# Altium PCB UI PCB.PcbDoc
Units mil, origin at the board's own origin, x right, y up, seen from the top; angles counter-clockwise.
Board outline 6000 x 4000 mil, 2 copper layers (Top Layer, Bottom Layer); 36 components, 51 nets, 159 pads, 0 vias.
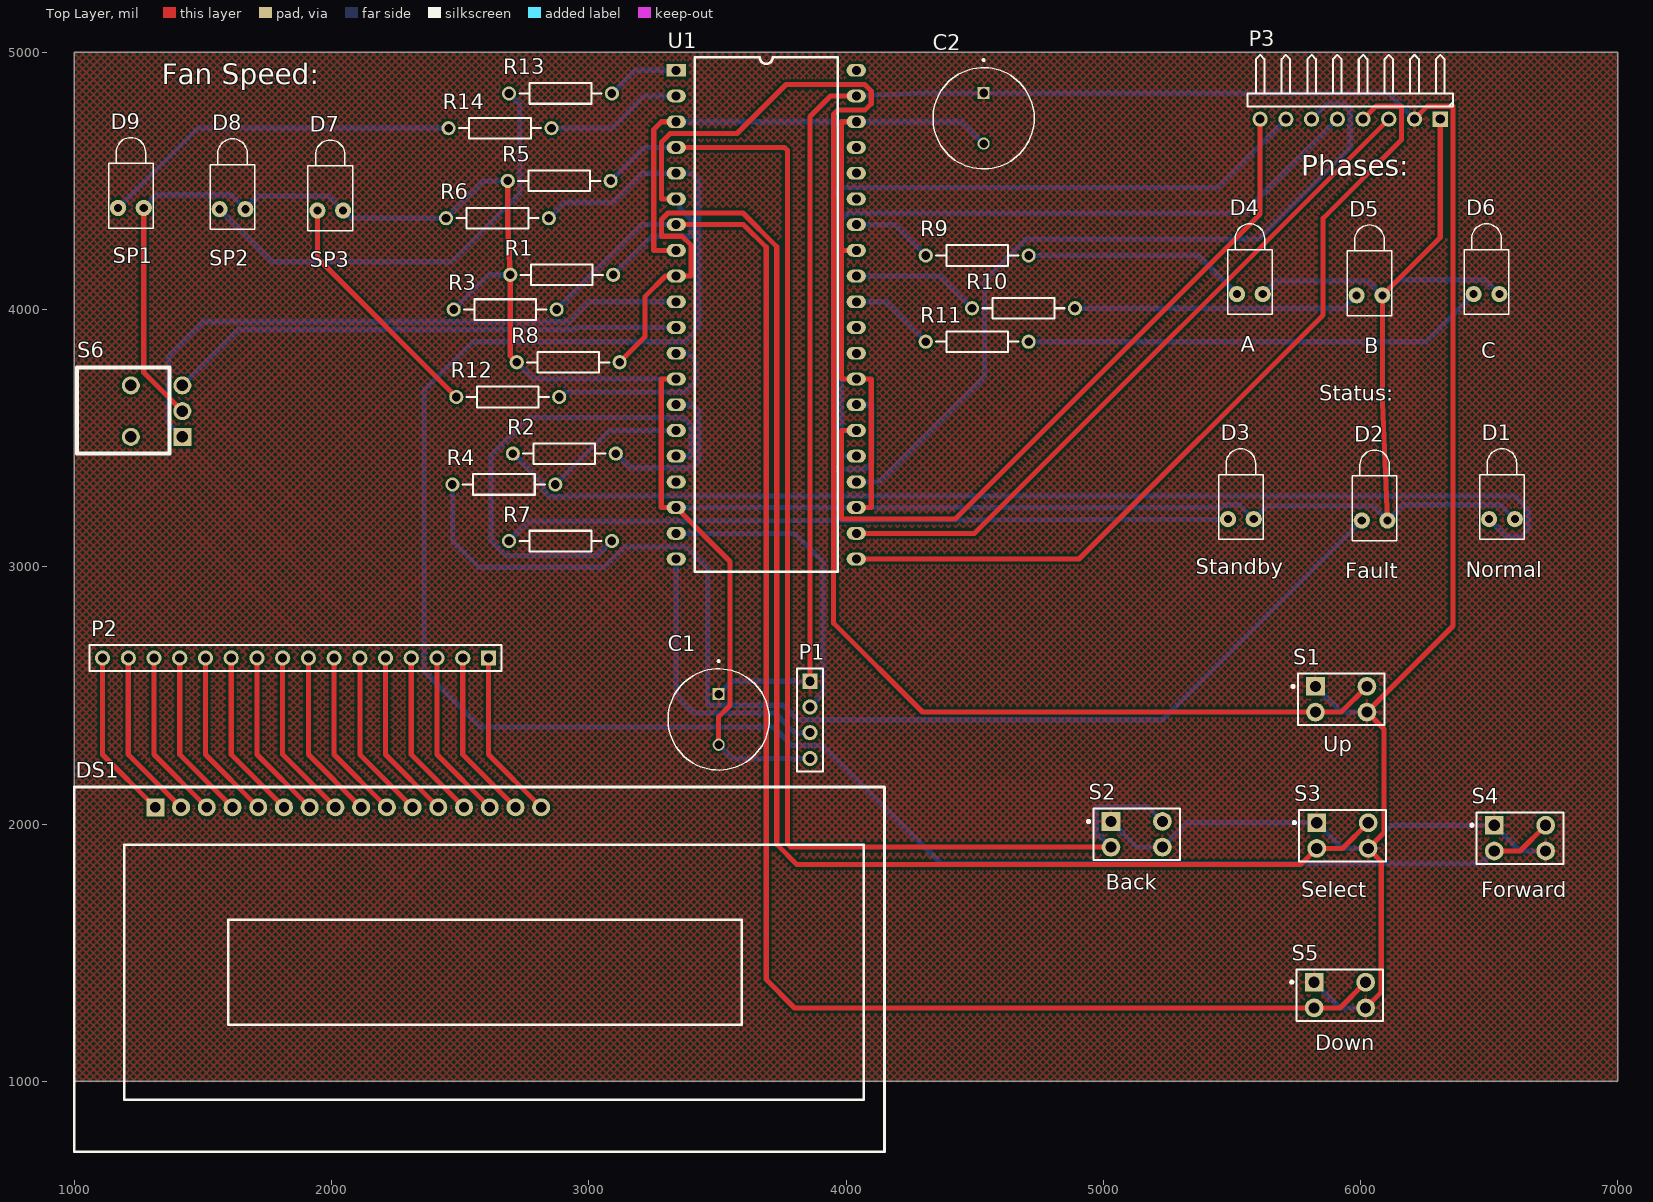
[diagram p0: Top Layer view]
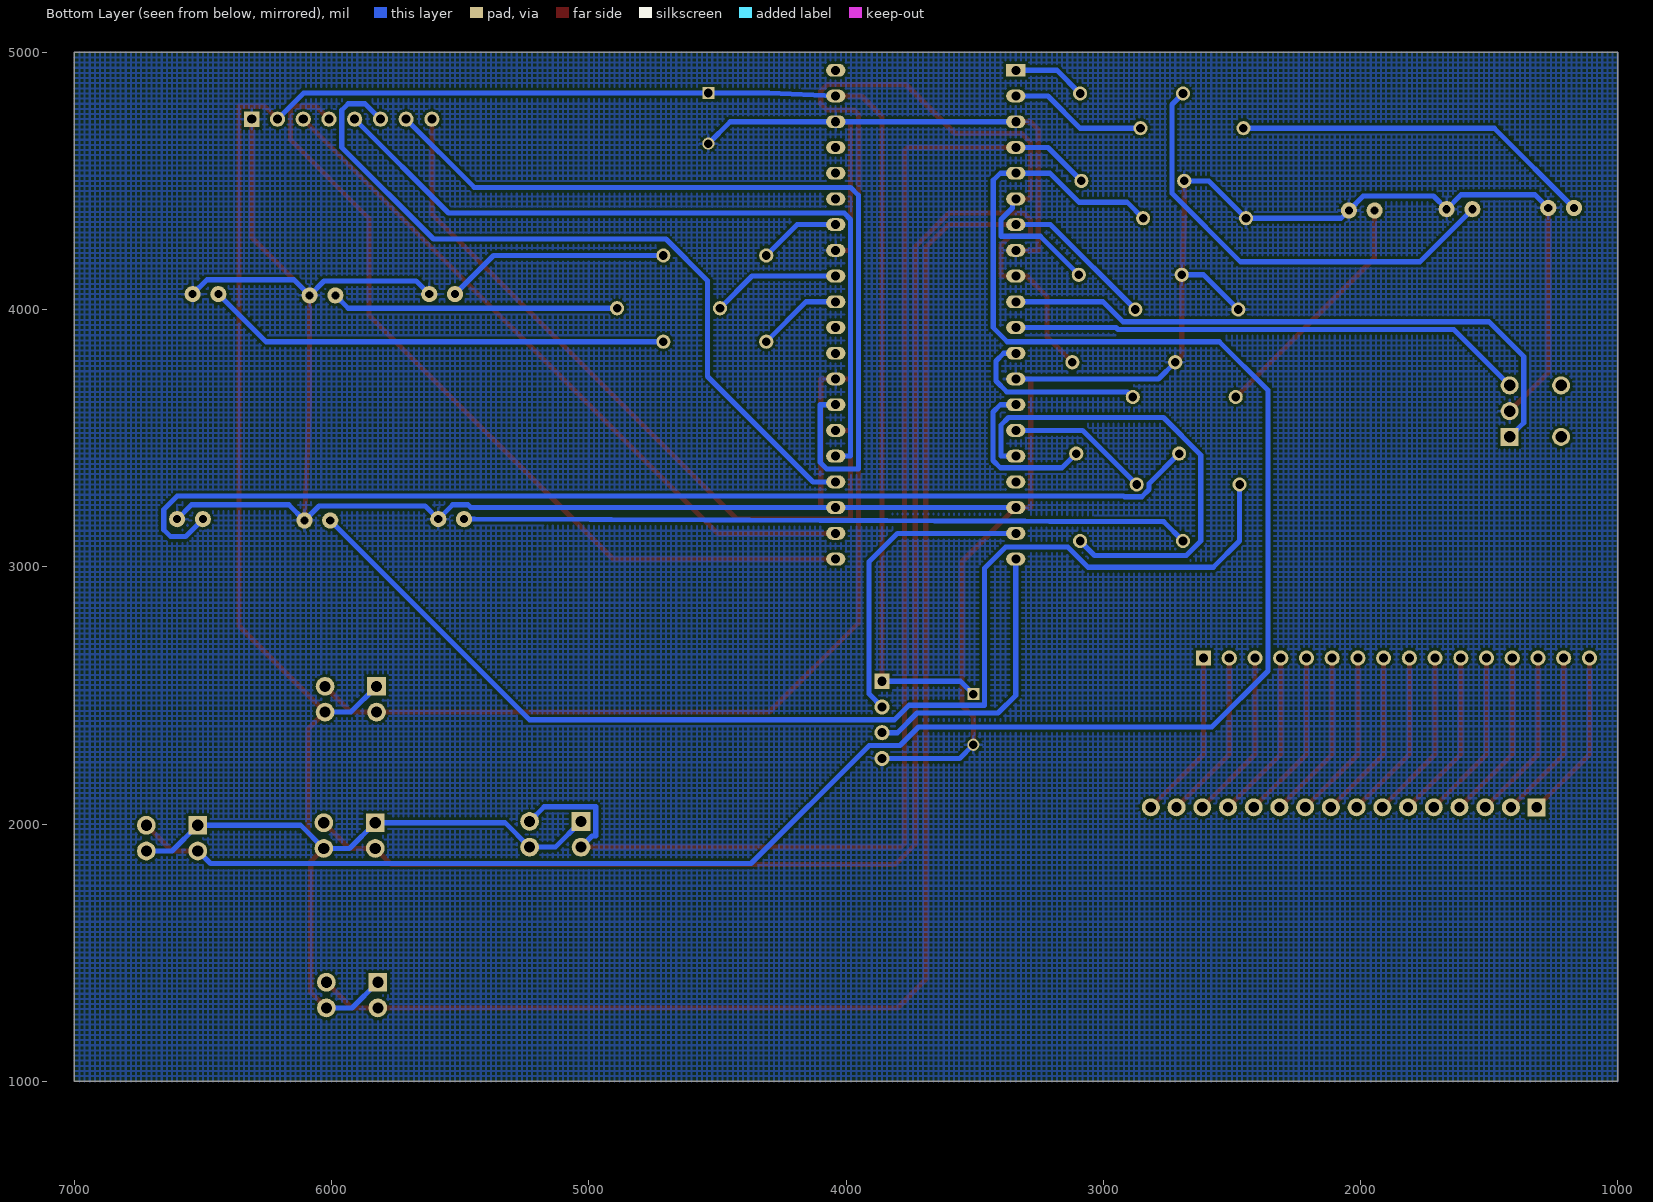
[diagram p1: Bottom Layer view, seen from below]

## Layer stack, top to bottom
Top Solder: solder mask 0.4, Solder Resist, Dk 3.5
Top Layer: signal copper 1.4
Dielectric 1: dielectric 12.6, FR-4, Dk 4.8
Bottom Layer: signal copper 1.4
Bottom Solder: solder mask 0.4, Solder Resist, Dk 3.5

## Board outline
1000,1000 7000,1000 7000,5000 1000,5000

## Design rules (kind name [scope] priority, off if disabled: settings)
Clearance [All] p1: gap=10 ignorepadtopadclearanceinfootprint=FALSE
PolygonConnect [All] p1: connectstyle=Relief reliefconductorwidth=10 reliefentries=4 polygonreliefangle="90 Angle" airgapwidth=10
RoutingVias [All] p1: holewidth=28 width=50 viastyle="Through Hole" minholewidth=28 minwidth=50 maxholewidth=28 maxwidth=50
SolderMaskExpansion [All] p1: expansion=4 istentingtop=FALSE
SupplyNets "Schematic Supply Nets_1" [InNet('VCC')] p1: voltage=0.000
SupplyNets "Schematic Supply Nets" [InNet('GND')] p2: voltage=0.000
Width [All] p1: maxlimit=20 minlimit=20 preferedwidth=20
30 further rules are at their usual default settings.

## Components (designator, comment, footprint, x,y, rotation, side; value= is the part's Value field where it differs from the comment)
C1 "100 uF PCap" "100uF PCap" 3505,2406.57 r270 top
C2 "100 uF PCap" "100uF PCap" 4535,4743.43 r270 top
D1 "LED-G" LED-1 6550,3185 r90 top
D2 "LED-R" LED-1 6055,3180 r90 top
D3 "LED-B" LED-1 5535,3185 r90 top
D4 "LED-G" LED-1 5570,4060 r90 top
D5 "LED-R" LED-1 6035,4055 r90 top
D6 "LED-B" LED-1 6490,4060 r90 top
D7 "LED-G" LED-1 1995,4385 r90 top
D8 "LED-R" LED-1 1615,4390 r90 top
D9 "LED-B" LED-1 1220,4395 r90 top
DS1 "LCD 44780" "OLED 16x2" 1315,2065 r0 top
P1 "Header 4" HDR1X4 3860,2555 r270 top
P2 "Header 16" HDR1X16 2610,2645 r180 top
P3 "Header 8H" HDR1X8H 6310,4740 r180 top
R1 "Res2" AXIAL-0.4 2895,4135 r180 top value=1K
R2 "Res2" AXIAL-0.4 2905,3440 r180 top value=1K
R3 "Res2" AXIAL-0.4 2675,4000 r180 top value=1K
R4 "Res2" AXIAL-0.4 2670,3320 r180 top value=1K
R5 "Res2" AXIAL-0.4 2885,4500 r180 top value=1K
R6 "Res2" AXIAL-0.4 2645,4355 r180 top value=1K
R7 "Res2" AXIAL-0.4 2890,3100 r180 top value=1K
R8 "Res2" AXIAL-0.4 2920,3795 r180 top value=1K
R9 "Res2" AXIAL-0.4 4510,4210 r0 top value=1K
R10 "Res2" AXIAL-0.4 4690,4005 r0 top value=1K
R11 "Res2" AXIAL-0.4 4510,3875 r0 top value=1K
R12 "Res2" AXIAL-0.4 2685,3660 r180 top value=1K
R13 "Res2" AXIAL-0.4 2890,4840 r180 top value=1K
R14 "Res2" AXIAL-0.4 2655,4705 r180 top value=1K
S1 "Up" DPST-4 5925,2485 r0 top
S2 "Back" DPST-4 5130,1960 r0 top
S3 "Select" DPST-4 5930,1955 r0 top
S4 "Forward" DPST-4 6620,1945 r0 top
S5 "Down" DPST-4 5920,1335 r0 top
S6 "SW-SPDT" "SW DPST jameco" 1421.89,3602.64 r270 top
U1 "Raspberry Pi Pico" "Raspberry Pi Pico" 3340,4930 r0 top

## Footprints (in the part's own frame and the unit in brackets; to place one, negate y for a bottom-side part, rotate by r counter-clockwise, add the part's x,y. Pads: shape width x height; smd on the part's side, far side on the other; paste and mask are expansions set on the pad)
"100uF PCap" [mm]
  round 1.2 hole 0.85: N(2.5,0)
  rect 1.2x1.2 hole 0.85: P(-2.5,0)
  silkscreen extent -5.85,-5 5,5, body extent -5,-5 5,5, height 12.5
AXIAL-0.4 [mm] "Axial Device, Thru-Hole; 2 Leads; 0.4 in Pin Spacing"
  round 1.4 hole 0.85: 1(-5.08,0) 2(5.08,0)
  silkscreen extent -4.06,-1.02 4.06,1.02
DPST-4 [mm] "Switch; 4 Leads"
  rect 1.85x1.85 hole 1.1: 1(-2.54,1.27)
  round 1.85 hole 1.1: 2(-2.54,-1.27) 3(2.54,-1.27) 4(2.54,1.27)
  silkscreen extent -4.88,-2.54 4.28,2.54
HDR1X4 [mm] "Connector; Header; 4 Position"
  rect 1.5x1.5 hole 0.9: 1(0,0)
  round 1.5 hole 0.9: 2(2.54,0) 3(5.08,0) 4(7.62,0)
  silkscreen extent -1.27,-1.27 8.89,1.27
HDR1X8H [mm] "Connector; Header; 8 Position; Right Angle"
  rect 1.5x1.5 hole 0.9: 1(0,0)
  round 1.5 hole 0.9: 2(2.54,0) 3(5.08,0) 4(7.62,0) 5(10.16,0) 6(12.7,0) 7(15.24,0) 8(17.78,0)
  silkscreen extent -1.27,-6.35 19.05,-1.27
HDR1X16 [mm] "Connector; Header; 16 Position"
  rect 1.5x1.5 hole 0.9: 1(0,0)
  round 1.5 hole 0.9: 2(2.54,0) 3(5.08,0) 4(7.62,0) 5(10.16,0) 6(12.7,0) 7(15.24,0) 8(17.78,0) 9(20.32,0) 10(22.86,0) 11(25.4,0) 12(27.94,0) 13(30.48,0) 14(33.02,0) 15(35.56,0) 16(38.1,0)
  silkscreen extent -1.27,-1.27 39.37,1.27
LED-1 [mm] "LED; 2 Leads"
  round 1.6 hole 0.8: 1(0,1.27) 2(0,-1.27)
  silkscreen extent -2,-2.2 6.95,2.2
"OLED 16x2" [mil]
  rect 70x70 hole 40: 1(0,0)
  round 70 hole 40: 2(100,0) 3(200,0) 4(300,0) 5(400,0) 6(500,0) 7(600,0) 8(700,0) 9(800,0) 10(900,0) 11(1000,0) 12(1100,0) 13(1200,0) 14(1300,0) 15(1400,0) 16(1500,0)
  silkscreen extent -315,-1339 2835,79
"Raspberry Pi Pico" [mil]
  rect 75x50 hole 35: 1(0,0)
  oval 75x50 hole 35: 2(0,-100) 3(0,-200) 4(0,-300) 5(0,-400) 6(0,-500) 7(0,-600) 8(0,-700) 9(0,-800) 10(0,-900) 11(0,-1000) 12(0,-1100) 13(0,-1200) 14(0,-1300) 15(0,-1400) 16(0,-1500) 17(0,-1600) 18(0,-1700) 19(0,-1800) 20(0,-1900) 21(700,-1900) 22(700,-1800) 23(700,-1700) 24(700,-1600) 25(700,-1500) 26(700,-1400) 27(700,-1300) 28(700,-1200) 29(700,-1100) 30(700,-1000) 31(700,-900) 32(700,-800) 33(700,-700) 34(700,-600) 35(700,-500) 36(700,-400) 37(700,-300) 38(700,-200) 39(700,-100) 40(700,0)
  silkscreen extent 72,-1950 628,50
"SW DPST jameco" [mil]
  rect 70x70 hole 45: 1(97.64,-1.89)
  round 70 hole 45: 2(-2.36,-1.89) 3(-102.36,-1.89) 4(-102.36,-201.89) 5(97.64,-201.89)
  silkscreen extent -172,-412 162,-52

## Part data
C1 C2: "Capacitor; Aluminum Electrolytic; Radial Al Electrolytic Cap; 100uF 63V", Package="RADIAL-2 Panasonic", Availability="In Stock", Check_prices=https://www.snapeda.com/parts/EEU-FC1J101/Panasonic%20Electronic%20Components/view-part/494707/?ref=eda, MF="Panasonic Electronic", MP=EEU-FC1J101, Price=None, SnapEDA_Link=https://www.snapeda.com/parts/EEU-FC1J101/Panasonic%20Electronic%20Components/view-part/494707/?ref=snap
D1 D2 D3 D4 D5 D6 D7 D8 D9: library part LED1, "Typical RED GaAs LED", LatestRevisionDate=08-Jul-2005, LatestRevisionNote="Mech Layer 1 removed.", PackageDescription="LED; 2 Leads", PackageReference=LED-1, Published=8-Jun-2000, Publisher="Altium Limited"
P1: "Header, 4-Pin", LatestRevisionDate=17-Jul-2002, LatestRevisionNote="Re-released for DXP Platform.", Publisher="Altium Limited"
P2: "Header, 16-Pin", LatestRevisionDate=17-Jul-2002, LatestRevisionNote="Re-released for DXP Platform.", Publisher="Altium Limited"
P3: "Header, 8-Pin, Right Angle", LatestRevisionDate=17-Jul-2002, LatestRevisionNote="Re-released for DXP Platform.", Publisher="Altium Limited"
R1 R2 R3 R4 R5 R6 R7 R8 R9 R10 R11 R12 R13 R14: "Resistor", LatestRevisionDate=17-Jul-2002, LatestRevisionNote="Re-released for DXP Platform.", PackageDescription="Axial Device, Thru-Hole; 2 Leads; 0.4 in Pin Spacing", PackageReference=AXIAL-0.4, Published=8-Jun-2000, Publisher="Altium Limited"
S1 S2 S3 S4 S5: library part SW-DPST, "Double-Pole, Single-Throw Switch", LatestRevisionDate=17-Jul-2002, LatestRevisionNote="Re-released for DXP Platform.", PackageDescription="Switch; 4 Leads", PackageReference=DPST-4, Published=24-Mar-1999, Publisher="Altium Limited"
S6: "SPDT Subminiature Toggle Switch, Right Angle Mounting, Vertical Actuation", ComponentLink1Description="Manufacturer Link", ComponentLink1URL=http://www.apem.com, DatasheetVersion=05-Dec-2000, LatestRevisionDate=17-Dec-2003, LatestRevisionNote="Schematic revised, PCB Footprint replaced.", PackageDescription="Switch; 4 Leads", PackageReference=TL36WW15050, Published=24-Mar-1999, Publisher="Altium Limited"

## Nets (pads, with @x,y where several pads share a name; then routed paths per layer and width w, separated by ;. In a path a pad name is that pad's centre, name@x,y a point inside that pad or via, vN(x,y) a via of type N, cw(c..) or ccw(c..) an arc to the next point about the centre after c; other vN are vias at no path point)
B_LED: R7.1 U1.16 | length 1877.9
  Bottom Layer w20: R7.1 3034,3044 2677,3044 2621,3100 2621,3435 2766,3580 3368,3580 3398,3550 3398,3430 U1.16
Back_In: R5.1 S2.2 S2.4 U1.4 | length 5174.2
  Top Layer w20: U1.4 3761,4630 3772,4619 3772,1923 3785,1910 S2.2
  Bottom Layer w20: R5.1 3215,4630 U1.4 ; S2.2 4987,1953 4973,1953 4973,2067 5173,2067 S2.4
CS: P3.3 U1.22 | length 2736.9
  Top Layer w20: U1.22 4500,3130 P3.3
Down_In: R3.1 S5.2 S5.4 U1.7 | length 6252.1
  Top Layer w20: U1.7 3602,4330 3690,4242 3690,1395 3800,1285 S5.2 5920,1285 S5.4
  Bottom Layer w20: R3.1 3205,4330 U1.7
Fanspeed1: R12.1 U1.12 | length 725.1
  Bottom Layer w20: R12.1 2905,3680 3375,3680 3417,3722 3417,3800 3387,3830 U1.12
Fanspeed2: R13.1 U1.1 | length 287.3
  Bottom Layer w20: R13.1 3180,4930 U1.1
Fanspeed3: R14.1 U1.2 | length 536.8
  Bottom Layer w20: R14.1 3090,4705 3215,4830 U1.2
Forward_In: R6.1 S4.2 S4.4 U1.5 | length 8230.7
  Top Layer w20: S4.2 6620,1895 S4.4
  Bottom Layer w20: R6.1 2907,4417 3094,4417 3207,4530 U1.5 3400,4530 3427.5,4502.5 3427.5,3929.5 3373,3875 2549,3875 2360,3686 2360,2595 2578,2377 3718.01,2377 3790.01,2305 3910,2305 4369,1846 6471,1846 S4.2
G_LED: R2.1 U1.14 | length 646
  Bottom Layer w20: R2.1 3160,3385 3400,3385 3428,3413 3428,3602 3400,3630 U1.14
GND: C1.N C2.N D1.2 D2.2 D3.2 D4.2 D5.2 D6.2 D7.2 D8.2 D9.2 P1.4 P3.1 R1.2 R3.2 R5.2 R6.2 R8.2 S6.2 U1.3 U1.8 U1.13 U1.18 U1.23 U1.28 U1.33 U1.38 | length 15811
  Top Layer w20: D9.2 1270,3755 S6.2 ; R5.2 2685,4328 R1.2 2695,3820 R8.2 ; U1.13 3282,3730 3282,3230 U1.18 3549,3021 3549,2461 3505,2417 C1.N ; U1.8 3252.5,4230 3252.5,4700 3282.5,4730 U1.3 ; U1.23 4098,3230 4098,3730 U1.28 3982,3730 3982,4230 ; U1.33 3982,4230 ; U1.38 3982,4730 3982,4230 ; D2.2 6085,3638 D5.2 6310,4280 P3.1
  Bottom Layer w20: D9.2 1321,4446 1609,4446 D8.2 1716,4441 1989,4441 D7.2 2075,4355 R6.2 2590,4500 R5.2 ; R3.2 2610,4135 R1.2 ; R8.2 2785,3730 U1.13 ; U1.18 U1.23 5459,3230 5470,3241 5529,3241 D3.2 5636,3236 6049,3236 D2.2 6166,3241 6544,3241 D1.2 ; U1.3 U1.38 4450,4730 C2.N ; C1.N 3558.15,2255 P1.4 ; D4.2 5671,4111 6029,4111 D5.2 6146,4116 6484,4116 D6.2
MISO: P3.4 U1.21 | length 3316.1
  Top Layer w20: U1.21 4906,3030 5855,3979 5855,4355 6160,4660 6160,4790 6060,4790 P3.4
MOSI: P3.5 U1.25 | length 3067.5
  Bottom Layer w20: U1.25 3982,3430 3982,4350 4007,4375 5545,4375 P3.5
NetD1_1: D1.1 R2.2 | length 4323.2
  Bottom Layer w20: R2.2 2822,3323 2822,3300 2850,3272 2918,3272 2921,3275 6600,3275 6652,3223 6652,3144 6625,3117 6568,3117 D1.1
NetD2_1: D2.1 R4.2 | length 4741.9
  Bottom Layer w20: R4.2 2470,3100 2572,2998 3059,2998 3138,3077 3379,3077 3461,2995 3461,2461.38 3754.57,2461.38 3810.94,2405 5230,2405 D2.1
NetD3_1: D3.1 R7.2 | length 2826.1
  Bottom Layer w20: R7.2 2765,3175 5445,3185 D3.1
NetD4_1: D4.1 R9.2 | length 872.1
  Bottom Layer w20: R9.2 5370,4210 D4.1
NetD5_1: D5.1 R10.2 | length 1115.7
  Bottom Layer w20: R10.2 5935,4005 D5.1
NetD6_1: D6.1 R11.2 | length 1806.6
  Bottom Layer w20: R11.2 6255,3875 D6.1
NetD7_1: D7.1 R12.2 | length 948.7
  Top Layer w20: D7.1 1945,4200 R12.2
NetD8_1: D8.1 R13.2 | length 1768.5
  Bottom Layer w20: D8.1 1769,4186 2467,4186 2733,4452 2733,4797 R13.2
NetD9_1: D9.1 R14.2 | length 1413.4
  Bottom Layer w20: D9.1 1480,4705 R14.2
NetDS1_1: DS1.1 P2.16 | length 664.9
  Top Layer w20: P2.16 1110,2270 DS1.1
NetDS1_2: DS1.2 P2.15 | length 664.9
  Top Layer w20: P2.15 1210,2270 DS1.2
NetDS1_3: DS1.3 P2.14 | length 664.9
  Top Layer w20: P2.14 1310,2270 DS1.3
NetDS1_4: DS1.4 P2.13 | length 664.9
  Top Layer w20: P2.13 1410,2270 DS1.4
NetDS1_5: DS1.5 P2.12 | length 664.9
  Top Layer w20: P2.12 1510,2270 DS1.5
NetDS1_6: DS1.6 P2.11 | length 664.9
  Top Layer w20: P2.11 1610,2270 DS1.6
NetDS1_7: DS1.7 P2.10 | length 664.9
  Top Layer w20: P2.10 1710,2270 DS1.7
NetDS1_8: DS1.8 P2.9 | length 664.9
  Top Layer w20: P2.9 1810,2270 DS1.8
NetDS1_9: DS1.9 P2.8 | length 664.9
  Top Layer w20: P2.8 1910,2270 DS1.9
NetDS1_10: DS1.10 P2.7 | length 664.9
  Top Layer w20: P2.7 2010,2270 DS1.10
NetDS1_11: DS1.11 P2.6 | length 664.9
  Top Layer w20: P2.6 2110,2270 DS1.11
NetDS1_12: DS1.12 P2.5 | length 664.9
  Top Layer w20: P2.5 2210,2270 DS1.12
NetDS1_13: DS1.13 P2.4 | length 664.9
  Top Layer w20: P2.4 2310,2270 DS1.13
NetDS1_14: DS1.14 P2.3 | length 664.9
  Top Layer w20: P2.3 2410,2270 DS1.14
NetDS1_15: DS1.15 P2.2 | length 664.9
  Top Layer w20: P2.2 2510,2270 DS1.15
NetDS1_16: DS1.16 P2.1 | length 664.9
  Top Layer w20: P2.1 2610,2270 DS1.16
OFF: S6.3 U1.11 | length 2013.2
  Bottom Layer w20: S6.3 1637.44,3922.44 2943,3922.44 2950.56,3930 U1.11
ON: S6.1 U1.10 | length 2398.3
  Bottom Layer w20: S6.1 1365,3560 1365,3817.44 1500,3952.44 2923,3952.44 3000.56,4030 U1.10
"Phase A": R9.1 U1.34 | length 319.7
  Bottom Layer w20: U1.34 4190,4330 R9.1
"Phase B": R10.1 U1.32 | length 501.8
  Bottom Layer w20: U1.32 4365,4130 R10.1
"Phase C": R11.1 U1.31 | length 334.2
  Bottom Layer w20: U1.31 4155,4030 R11.1
R_LED: R4.1 U1.15 | length 557
  Bottom Layer w20: R4.1 3080,3530 U1.15
SCK: P3.6 U1.24 | length 3006.6
  Bottom Layer w20: U1.24 4128,3330 4538,3740 4538,4112 4700,4274 5604,4274 5960,4630 5960,4775 5935,4800 5870,4800 P3.6
SCL: P1.3 U1.20 | length 1110.1
  Bottom Layer w20: U1.20 3340,2500 3408.62,2431.38 3723.63,2431.38 3800.01,2355 P1.3
SCL2: P3.7 U1.27 | length 3388
  Bottom Layer w20: U1.27 4100,3630 4100,3405 4075,3380 3952,3380 3952,4444 3983,4475 5445,4475 P3.7
SDA: P1.2 U1.19 | length 1201.3
  Bottom Layer w20: U1.19 3800,3130 3910,3020 3910,2505 P1.2
SDA2: P3.8 U1.26 | length 2891.3
  Top Layer w20: U1.26 3982,3530 3982,3185 4424,3185 5610,4371 P3.8
Select_In: R8.1 S3.2 S3.4 U1.9 | length 6059.1
  Top Layer w20: R8.1 3218,3893 3218,4050 3298,4130 U1.9 3398,4130 3398,4250 3363,4285 3282.5,4285 3282.5,4350 3307.5,4375 3600,4375 3731,4244 3731,1921 3810,1842 5767,1842 S3.2 5930,1905 S3.4
Up_In: R1.1 S1.2 S1.4 U1.6 | length 6187.5
  Top Layer w20: U1.6 3282.5,4430 3282.5,4650 3316.5,4684 3576,4684 3767,4875 4073,4875 4098,4850 4098,4800 4073,4775 3967,4775 3952,4760 3952,2780 4297,2435 S1.2 5925,2435 S1.4
  Bottom Layer w20: R1.1 3245,4285 3397.5,4285 3397.5,4350 3353,4394.5 3353,4430 U1.6
VCC: C1.P C2.P P1.1 P3.2 S1.1 S1.3 S2.1 S2.3 S3.1 S3.3 S4.1 S4.3 S5.1 S5.3 U1.39 | length 11283.5
  Top Layer w20: P1.1 3860,4750 3940,4830 U1.39 ; S5.3 6081,1346 6081,1854 S3.3 6091,1966 6091,2369 S1.3 6360,2770 6360,4790 6260,4790 P3.2
  Bottom Layer w20: C1.P 3555,2555 P1.1 ; U1.39 4298.85,4841.85 C2.P 6108.15,4841.85 P3.2 ; S2.1 5130,1910 S2.3 5325,2005 S3.1 5930,1905 S3.3 6120,1995 S4.1 6620,1895 S4.3 ; S5.1 5920,1285 S5.3 ; S1.1 5925,2435 S1.3
pads on no net: S6.4 S6.5 U1.17 U1.29 U1.30 U1.35 U1.36 U1.37 U1.40

## Polygon pours and split planes (outlines as drawn)
VCC on Top Layer "VCC_L01_P000" (hatched 45Degree grid 20 track 8, pour order 0): 1000,1000 1000,5000 7000,5000 7000,1000
GND on Bottom Layer "GND_L02_P001" (hatched 90Degree grid 20 track 8, pour order 1): 1000,1000 1000,5000 7000,5000 7000,1000

## Silkscreen, mask and mechanical layers (free items; w line width, h text height)
Top Overlay:
  text "Fan Speed:" at 1340,4876.66 h80
  text "Phases:" at 5770,4520 h80
  text "SP1" at 1150,4180 h60
  text "SP2" at 1525,4170 h60
  text "SP3" at 1915,4165 h60
  text "A" at 5535,3835 h60
  text "B" at 6015,3830 h60
  text "C" at 6470,3810 h60
  text "Status:" at 5840,3645 h60
  text "Standby" at 5360,2969.99 h60
  text "Normal" at 6410,2960 h60
  text "Fault" at 5940,2955 h60
  text "Up" at 5855,2279.99 h60
  text "Back" at 5010,1745 h60
  text "Select" at 5770,1715 h60
  text "Forward" at 6470,1715 h60
  text "Down" at 5825,1120 h60